# Altium PCB PCB1.PcbDoc
Units mil, origin at the board's own origin, x right, y up, seen from the top; angles counter-clockwise.
Board outline 1025 x 1090 mil, 2 copper layers (Top Layer, Bottom Layer); 4 components, 6 nets, 20 pads, 4 vias.
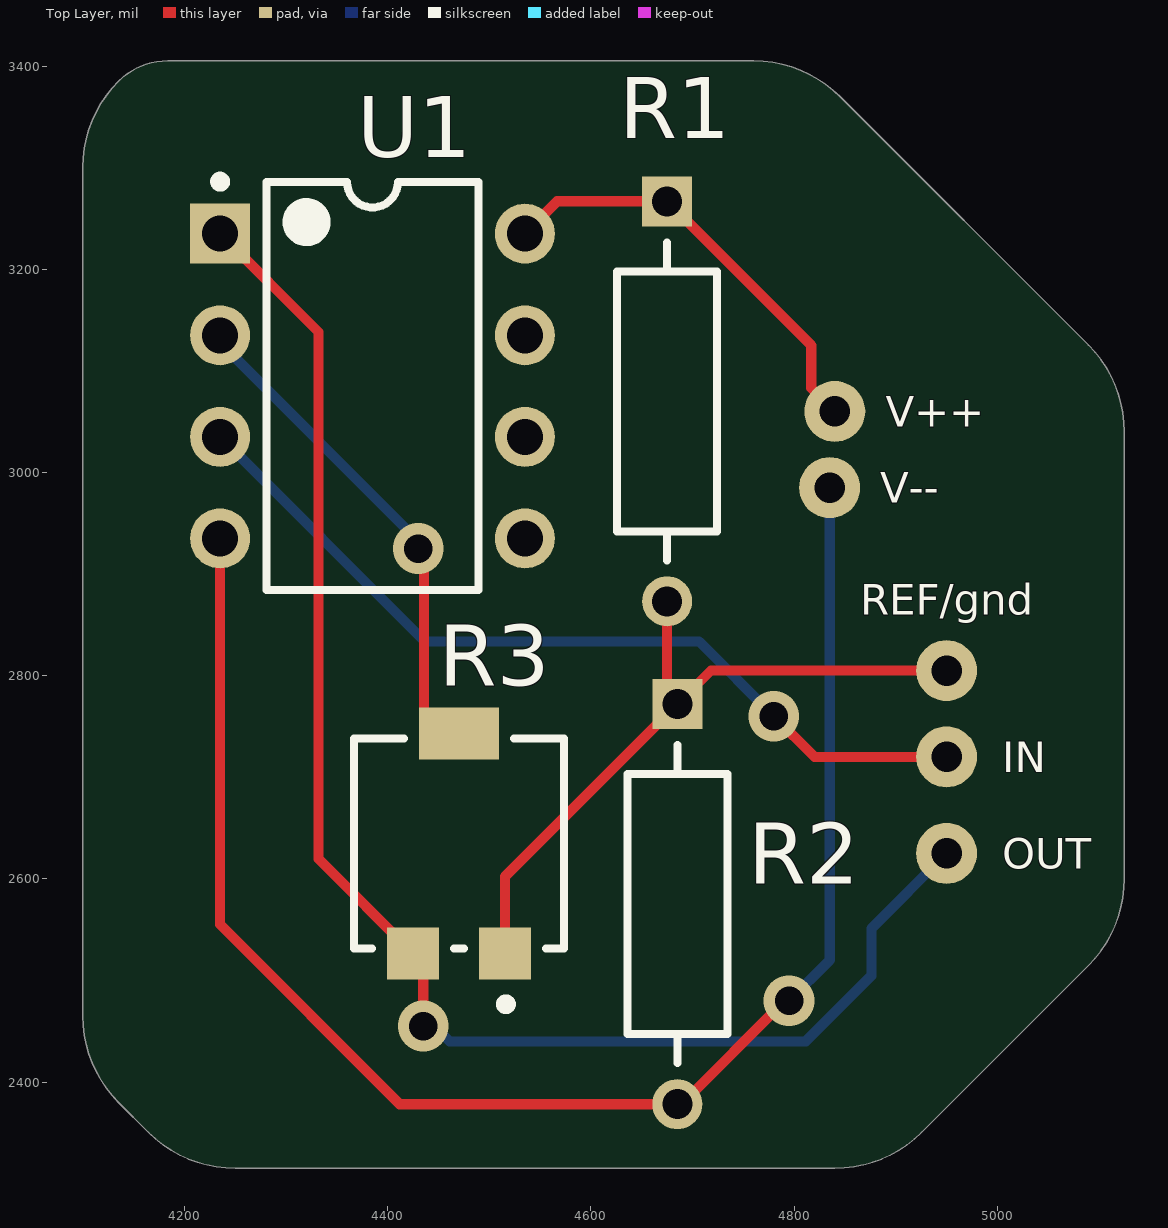
[diagram p0: Top Layer view]
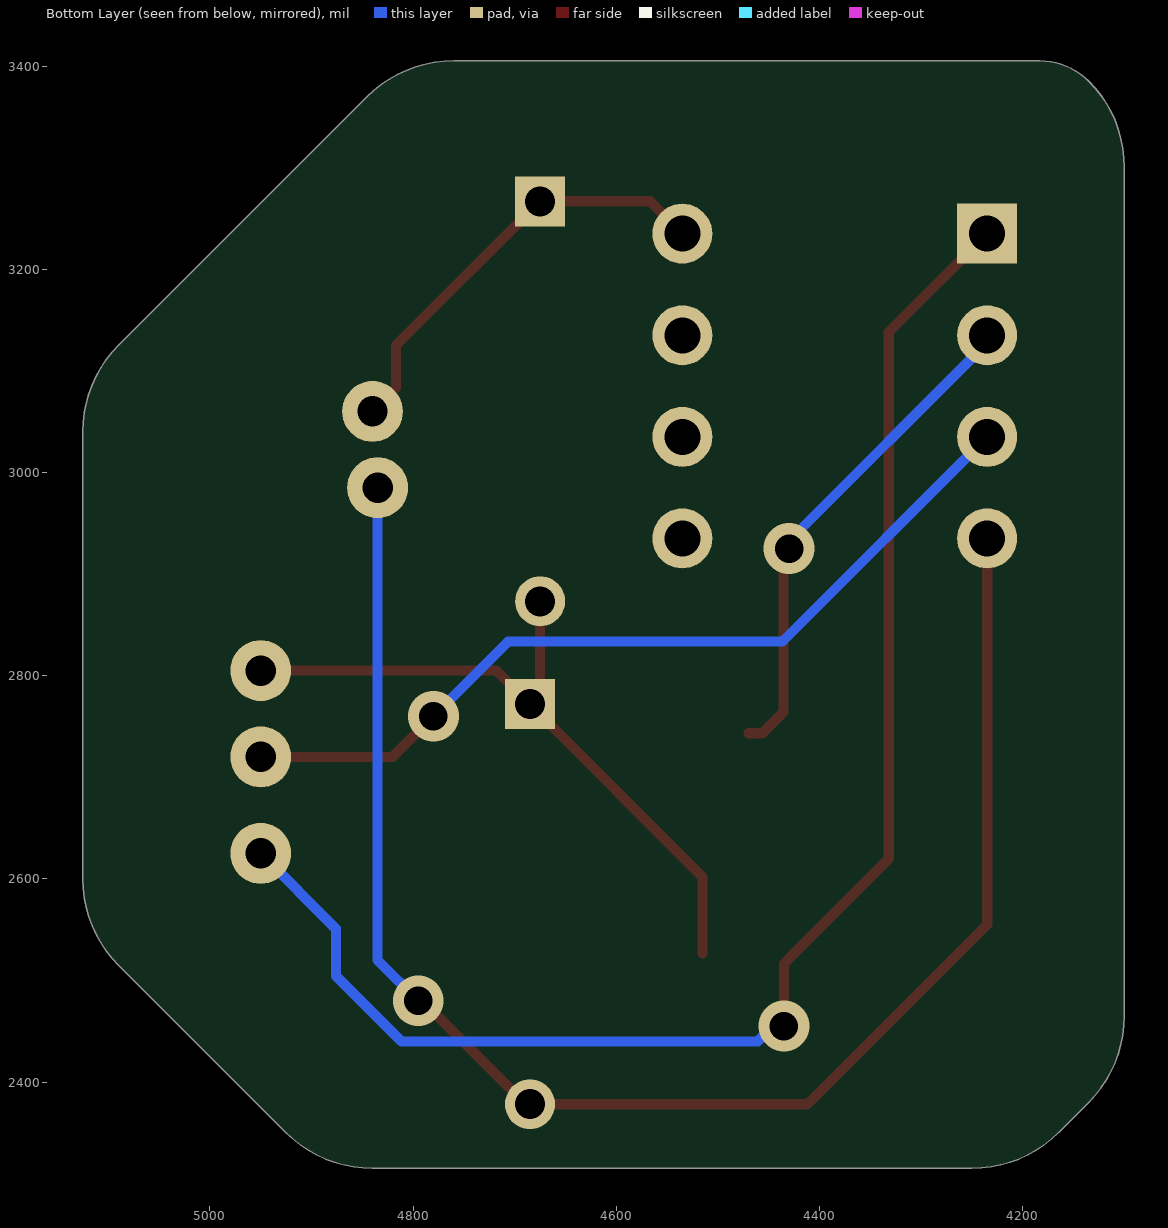
[diagram p1: Bottom Layer view, seen from below]
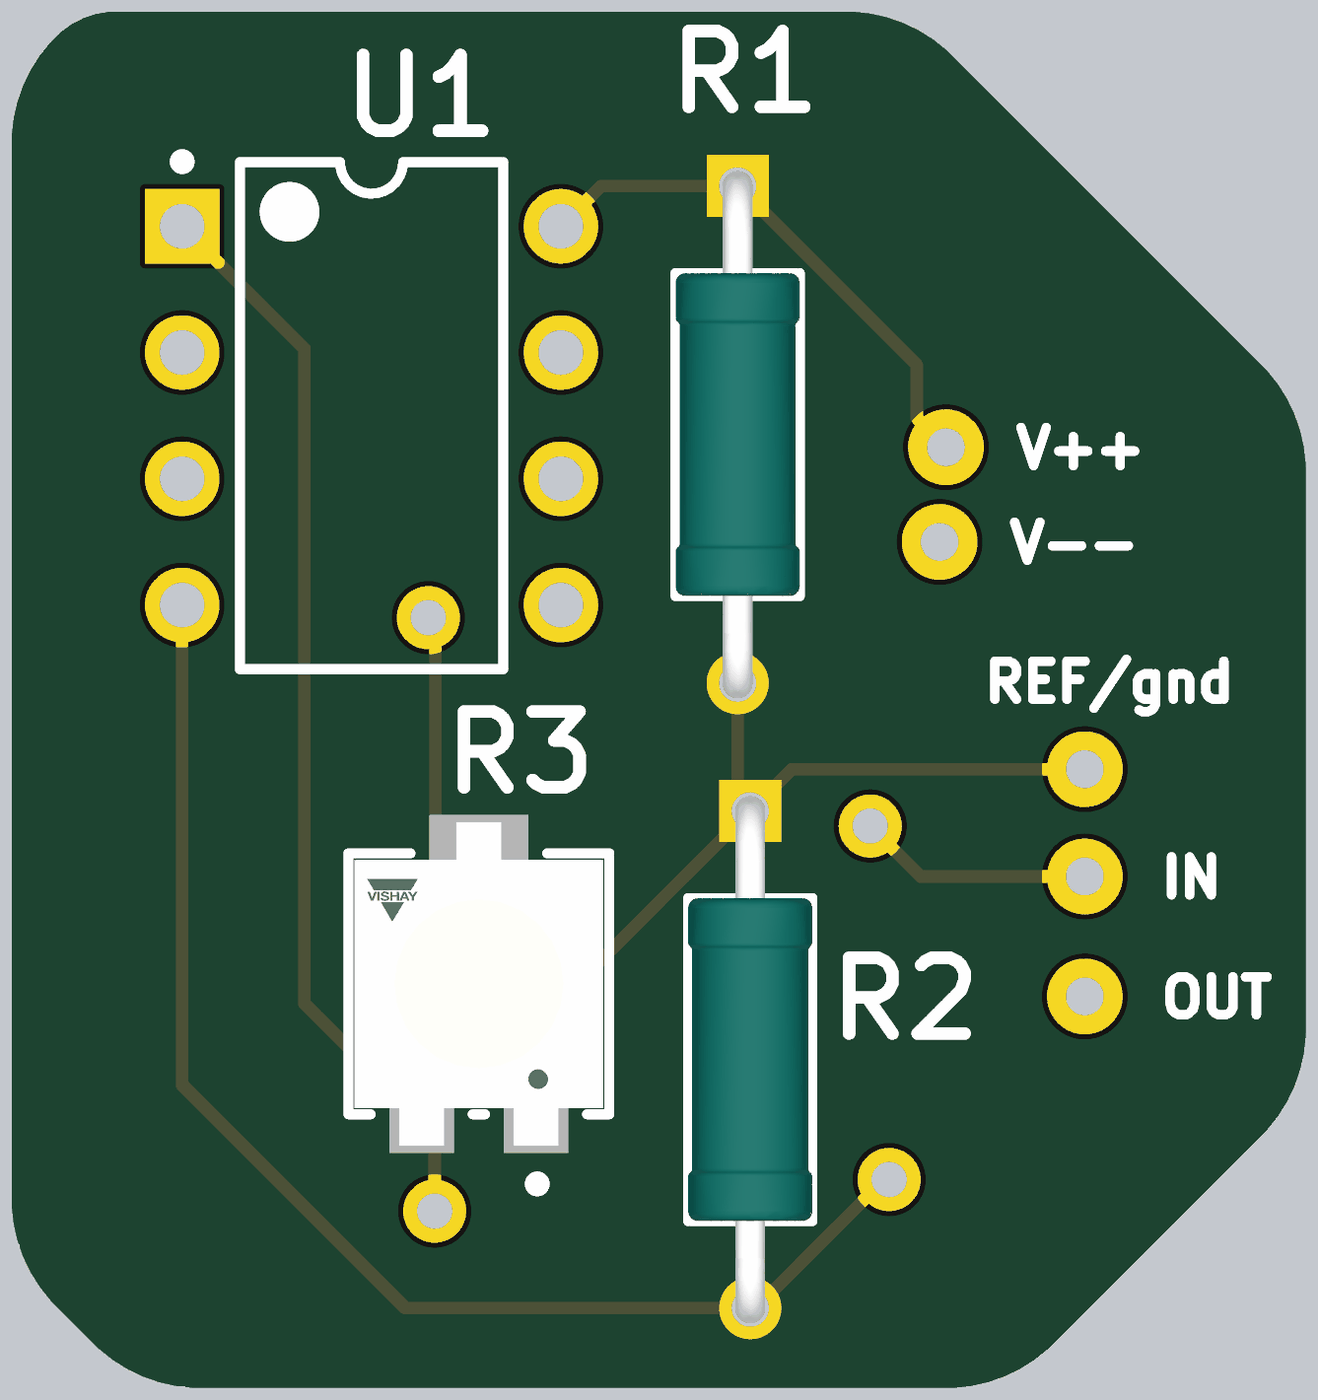
[diagram p2: 3D render of the assembled board from above, using the file's embedded part models]

## Layer stack, top to bottom
Top Solder: solder mask 0.4, Solder Resist, Dk 3.5
Top Layer: signal copper 1.4
Dielectric 1: dielectric 12.6, FR-4, Dk 4.8
Bottom Layer: signal copper 1.4
Bottom Solder: solder mask 0.4, Solder Resist, Dk 3.5

## Board outline
4135.36,2379.64 4164.64,2350.36 ccw(c4250,2435.71) 4250,2315 4840,2315 ccw(c4840,2435.71) 4925.36,2350.36 5089.64,2514.64 ccw(c5004.29,2600) 5125,2600 5125,3040 ccw(c5004.29,3040) 5089.64,3125.36 4845.36,3369.64 ccw(c4760,3284.29) 4760,3405 4183.28,3405 ccw(c4183.28,3336.72) 4135,3385 ccw(c4219.5,3300.5) 4100,3300.5 4100,2465 ccw(c4220.71,2465)

## Design rules (kind name [scope] priority, off if disabled: settings)
Clearance [All] p1: gap=10 ignorepadtopadclearanceinfootprint=FALSE
PolygonConnect [All] p1: connectstyle=Relief reliefconductorwidth=10 reliefentries=4 polygonreliefangle="90 Angle" airgapwidth=10
RoutingVias [All] p1: holewidth=28 width=50 viastyle="Through Hole" minholewidth=28 minwidth=50 maxholewidth=28 maxwidth=50
SolderMaskExpansion [All] p1: expansion=4 istentingtop=FALSE
SupplyNets "Schematic Supply Nets" [InNet('V--')] p1: voltage=0.000
SupplyNets "Schematic Supply Nets_4" [InNet('V++')] p2: voltage=0.000
SupplyNets "Schematic Supply Nets_2" [InNet('REF')] p3: voltage=0.000
Width [All] p1: maxlimit=10 minlimit=10 preferedwidth=10
30 further rules are at their usual default settings.

## Components (designator, comment, footprint, x,y, rotation, side; value= is the part's Value field where it differs from the comment)
R1 "1k" FP-MRS25-MFG 4675,3070 r270 top
R2 "1k" FP-MRS25-MFG 4685,2575 r270 top
R3 "10k linear potentiometer" FP-TS53YL-MFG 4470,2635 r0 top
U1 "LM358P" P0008A 4385,3085 r0 top

## Footprints (in the part's own frame and the unit in brackets; to place one, negate y for a bottom-side part, rotate by r counter-clockwise, add the part's x,y. Pads: shape width x height; smd on the part's side, far side on the other; paste and mask are expansions set on the pad)
FP-MRS25-MFG [mm]
  rect 1.25x1.25 hole 0.75 paste-2539.97 mask+0: 1(-5,0)
  round 1.25 hole 0.75 paste-2539.97 mask+0: 2(5,0)
  silkscreen extent -3.98,-1.25 3.98,1.25, body extent -5.72,-1.35 5.72,1.35, height 0.25
FP-TS53YL-MFG [mm]
  rect 1.3x1.3 smd paste+0 mask+0: 1(1.15,-2.75) 3(-1.15,-2.75)
  rect 2x1.3 smd paste+0 mask+0: 2(0,2.75)
  silkscreen extent -2.63,-4.15 2.63,2.63, body extent -2.73,-3.5 2.73,3.5, height 0.25
P0008A [mm] "DIP, 8-Leads, Body 10.15x6.6mm, Pitch 2.54mm"
  rect 1.5x1.5 hole 0.9: 1(-3.81,3.81)
  round 1.5 hole 0.9: 2(-3.81,1.27) 3(-3.81,-1.27) 4(-3.81,-3.81) 5(3.81,-3.81) 6(3.81,-1.27) 7(3.81,1.27) 8(3.81,3.81)
  silkscreen extent -3.93,-5.1 2.65,5.23, body extent -3.95,-5.07 3.95,5.07, height 5.08

## Part data
R1 R2: library part CMP-02408-000051-1, "RES 1K OHM 0.6W 1% AXIAL", Case/Package=Axial, Max Operating Temperature=155°C, Max Power Dissipation=600mW, Min Operating Temperature=-55°C, Package Quantity=5000, Resistance=1kR, Resistance Tolerance=1%, Resistor Type="Metal Film", Temperature Coefficient=50ppm/°C, Voltage Rating=350V, Construction=Cylindrical, Contact Plating=Tin, Diameter=2.5mm, Lead Diameter=0.6mm, Lead Free="Lead Free", Length=6.5mm, Military Standard=Not, Mount="Through Hole", Number of Pins=2, Number of Terminations=2, Packaging="Tape and Reel", Power Rating=600mW, Radiation Hardening=No, RoHS Compliant=Yes, Series=MRS25, Technology="THIN FILM", Termination=Axial, Tolerance=1%, Voltage Rating (DC)=350V, Weight=0.00776oz, Width=2.5mm
R3: library part CMP-02410-000004-1, "TRIMMER 10K OHM 0.25W GW TOP ADJ", Max Operating Temperature=125°C, Max Power Dissipation=250mW, Min Operating Temperature=-55°C, Package Quantity=1, Resistance=10kR, Resistance Tolerance=20%, Resistor Type=Cermet, Temperature Coefficient=100ppm/°C, Depth=6.4mm, Height=2.7mm, Lead Free="Lead Free", Length=5mm, Military Standard=Not, Mount="Surface Mount", Number of Turns=1, Packaging="Tape and Reel", Power Rating=250mW, Radiation Hardening=No, RoHS Compliant=Yes, Series=TS53Y, Taper=Linear, Technology=CERMET, Termination="Gull Wing", Tolerance=20%, Width=5mm
U1: library part CMP-2000-06549-1, "Dual Operational Amplifier, 3 to 32 V, 0 to 70 degC, 8-Pin PDIP (P), RoHS, Tape and Reel", Manufacturer="Technik Industrial", Package Description="8-Pin Double In-line Package, Body 9.59 x 6.35 mm, Pitch 2.54 mm", Package Reference=P8, Datasheet URL=http://www.ti.com/lit/ds/symlink/lm358.pdf, Datasheet Version="Rev. T, 04/2015", Manufacturer URL=http://www.technik.com.hk/, Mounting Technology=ThroughHole, Package URL=http://www.ti.com/lit/ml/mpdi001b/mpdi001b.pdf

## Free pads (board coordinates)
  round 60 hole 30: 2(4840,3060) 3(4835,2985) 4(4950,2805) 5(4950,2720) 6(4950,2625)

## Via types
v1: diameter 50, hole 28, Top Layer to Bottom Layer, 4 vias

## Nets (pads, with @x,y where several pads share a name; then routed paths per layer and width w, separated by ;. In a path a pad name is that pad's centre, name@x,y a point inside that pad or via, vN(x,y) a via of type N, cw(c..) or ccw(c..) an arc to the next point about the centre after c; other vN are vias at no path point)
NetR3_2: R3.2 U1.2 | length 497.1
  Top Layer w10: v1(4430,2925) 4435.63,2919.37 4435.63,2763.86 4456.22,2743.27 R3.2
  Bottom Layer w10: U1.2 4235,3127.5 4430,2932.5 v1(4430,2925)
OUTPUT: pad.6 R3.3 U1.1 | length 1488
  Top Layer w10: U1.1 4331.83,3138.17 4331.83,2619.63 R3.3 4435,2516.46 v1(4435,2455)
  Bottom Layer w10: v1(4435,2455) 4445.82,2455 4460.82,2440 4811.57,2440 4876,2504.43 4876,2551 pad.6
REF: pad.4 R1.2 R2.1 R3.1 | length 699.6
  Top Layer w10: R3.1 4515.28,2602.13 R2.1 ; R1.2 4675,2781.85 R2.1 ; pad.4 4718.15,2805 R2.1
"Sine IN": pad.5 U1.3 | length 845.5
  Top Layer w10: v1(4780,2760) 4820,2720 pad.5
  Bottom Layer w10: U1.3 4436.46,2833.54 4706.46,2833.54 v1(4780,2760)
V++: pad.2 R1.1 U1.8 | length 428.4
  Top Layer w10: U1.8 4566.85,3266.85 R1.1 4816.85,3125 4816.85,3083.15 pad.2
v--: pad.3 R2.2 U1.4 | length 1577
  Top Layer w10: U1.4 4235,2555 4411.85,2378.15 R2.2 4689.07,2378.15 4790.93,2480 v1(4795,2480)
  Bottom Layer w10: v1(4795,2480) 4835,2520 pad.3
pads on no net: U1.5 U1.6 U1.7

## Silkscreen, mask and mechanical layers (free items; w line width, h text height)
Top Overlay:
  text "V++" at 4890,3045 h30
  text "V--" at 4885,2970 h30
  text "REF/gnd" at 4865,2860 h30
  text "IN" at 5005,2705 h30
  text "OUT" at 5005,2610 h30
Mechanical 1:
  lines w10: 4100,2465 ccw(c4220.71,2465) 4135.36,2379.64 4164.64,2350.36 ccw(c4250,2435.71) 4250,2315 4840,2315 ccw(c4840,2435.71) 4925.36,2350.36 5089.64,2514.64 ccw(c5004.29,2600) 5125,2600 5125,3040 ccw(c5004.29,3040) 5089.64,3125.36 4845.36,3369.64 ccw(c4760,3284.29) 4760,3405 4310,3405 4183.28,3405 ccw(c4183.28,3336.72) 4135,3385 ccw(c4219.5,3300.5) 4100,3300.5 4100,2465